# Altium PCB Tigershark-rev2-Panel.PcbDoc
Units mil, origin at the board's own origin, x right, y up, seen from the top; angles counter-clockwise.
Board outline 4612.83 x 8609.74 mil, 4 copper layers (Top Layer, Groun Plane, Power Plane, Bottom Layer), stack 64.208 mil thick; 8 components, 0 nets, 12 pads, 0 vias.
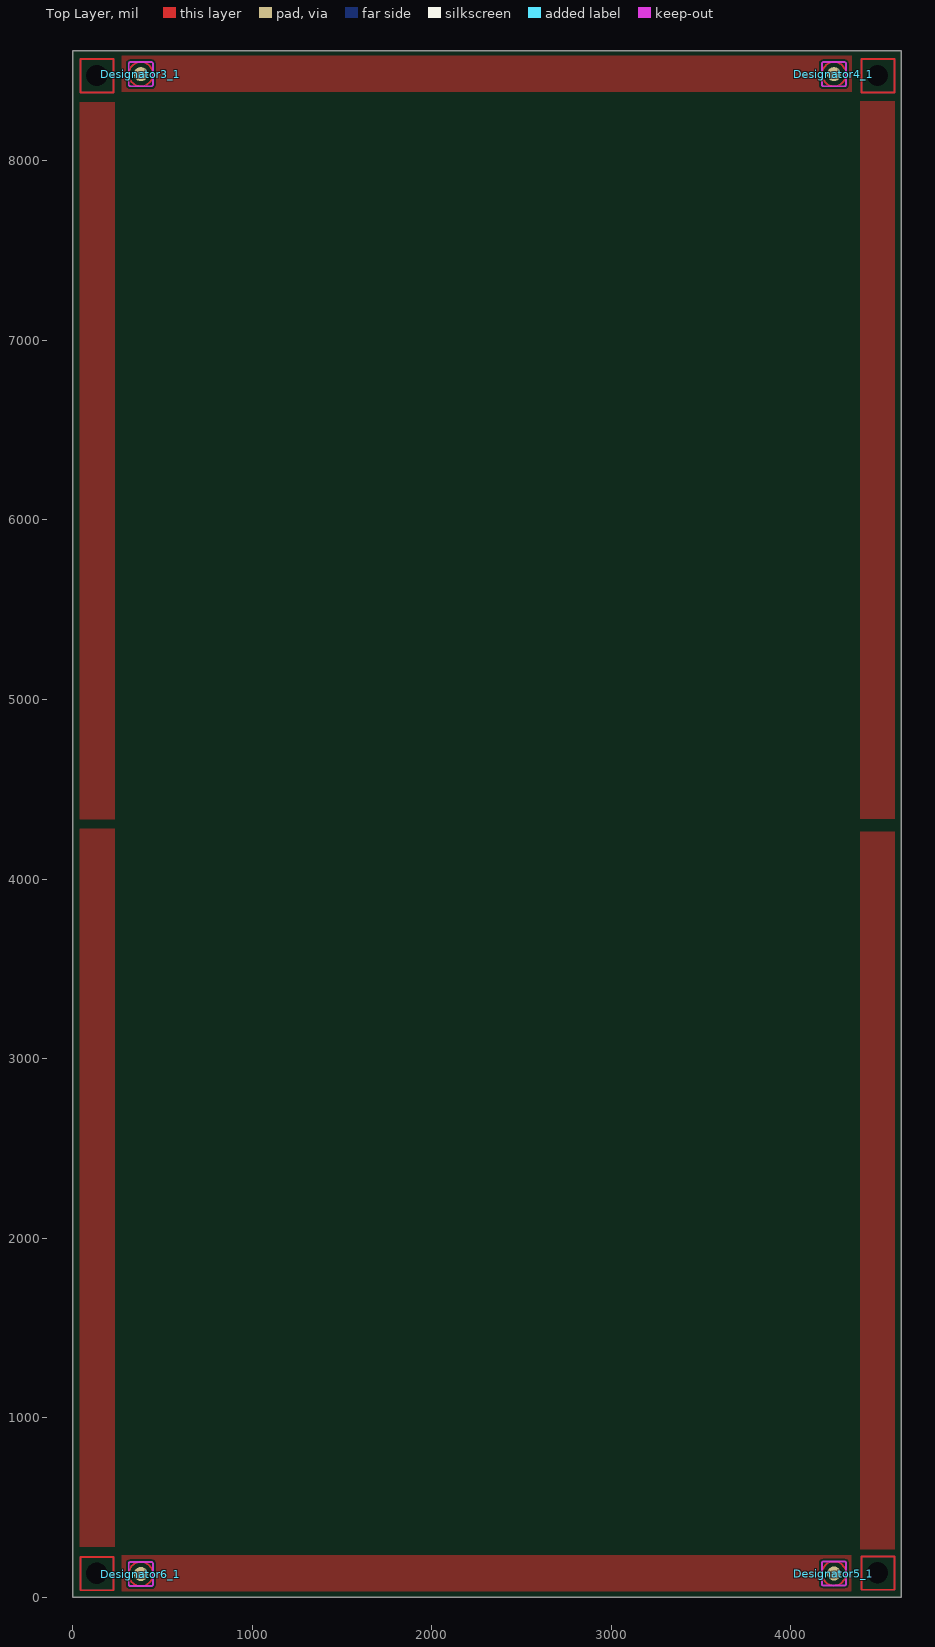
[diagram p0: Top Layer view]
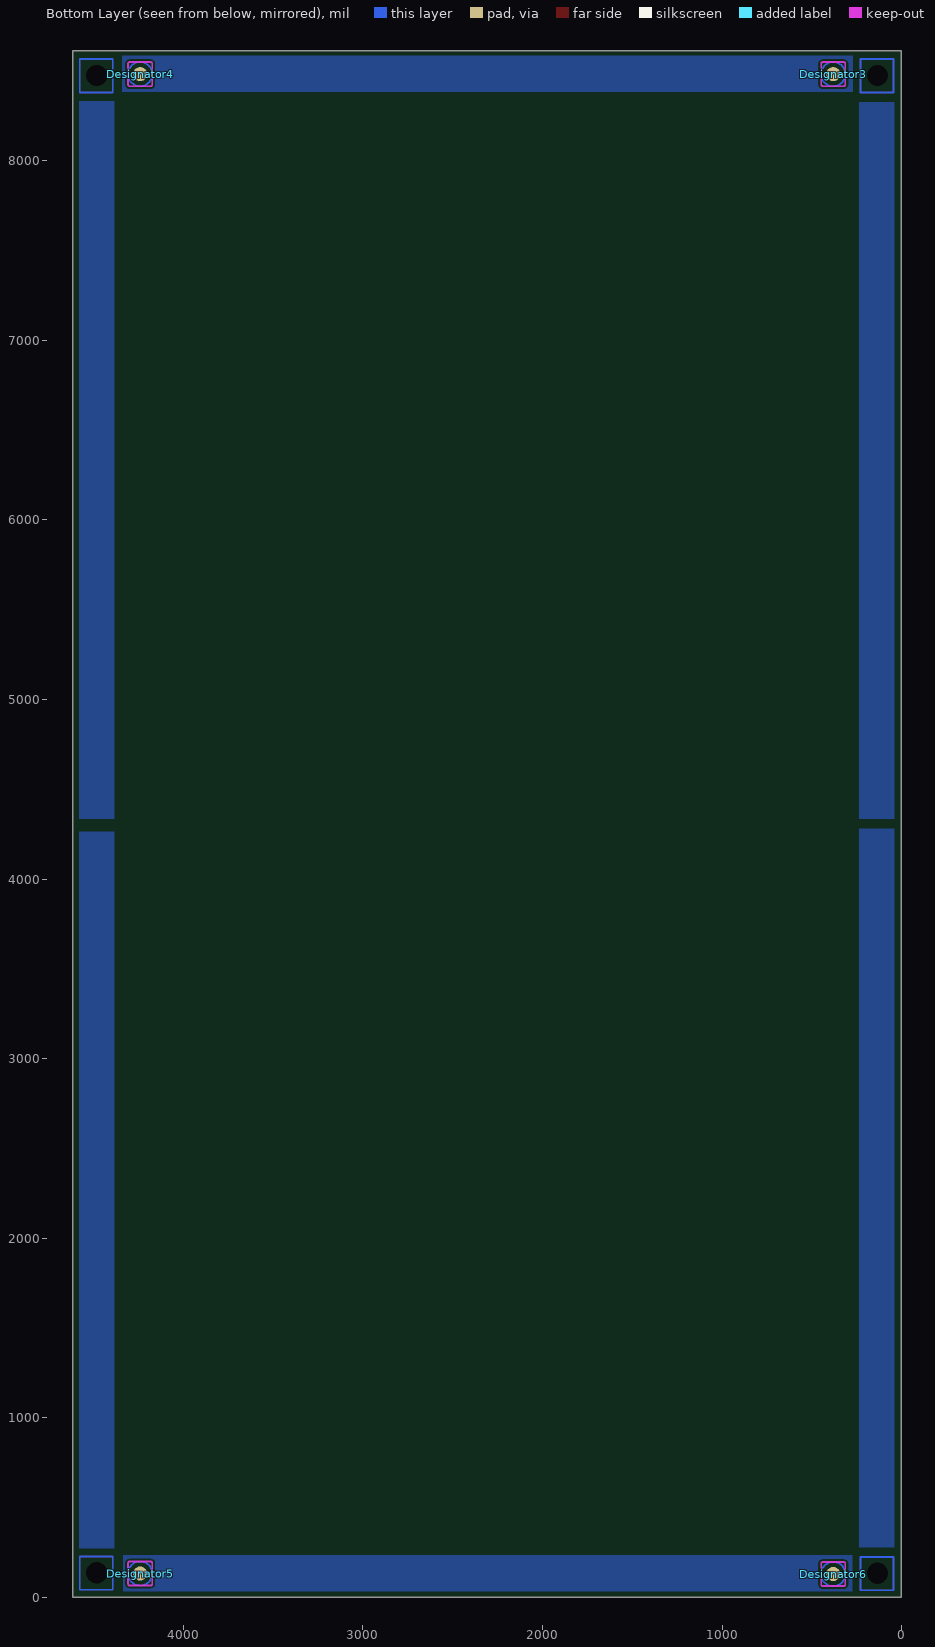
[diagram p1: Bottom Layer view, seen from below]
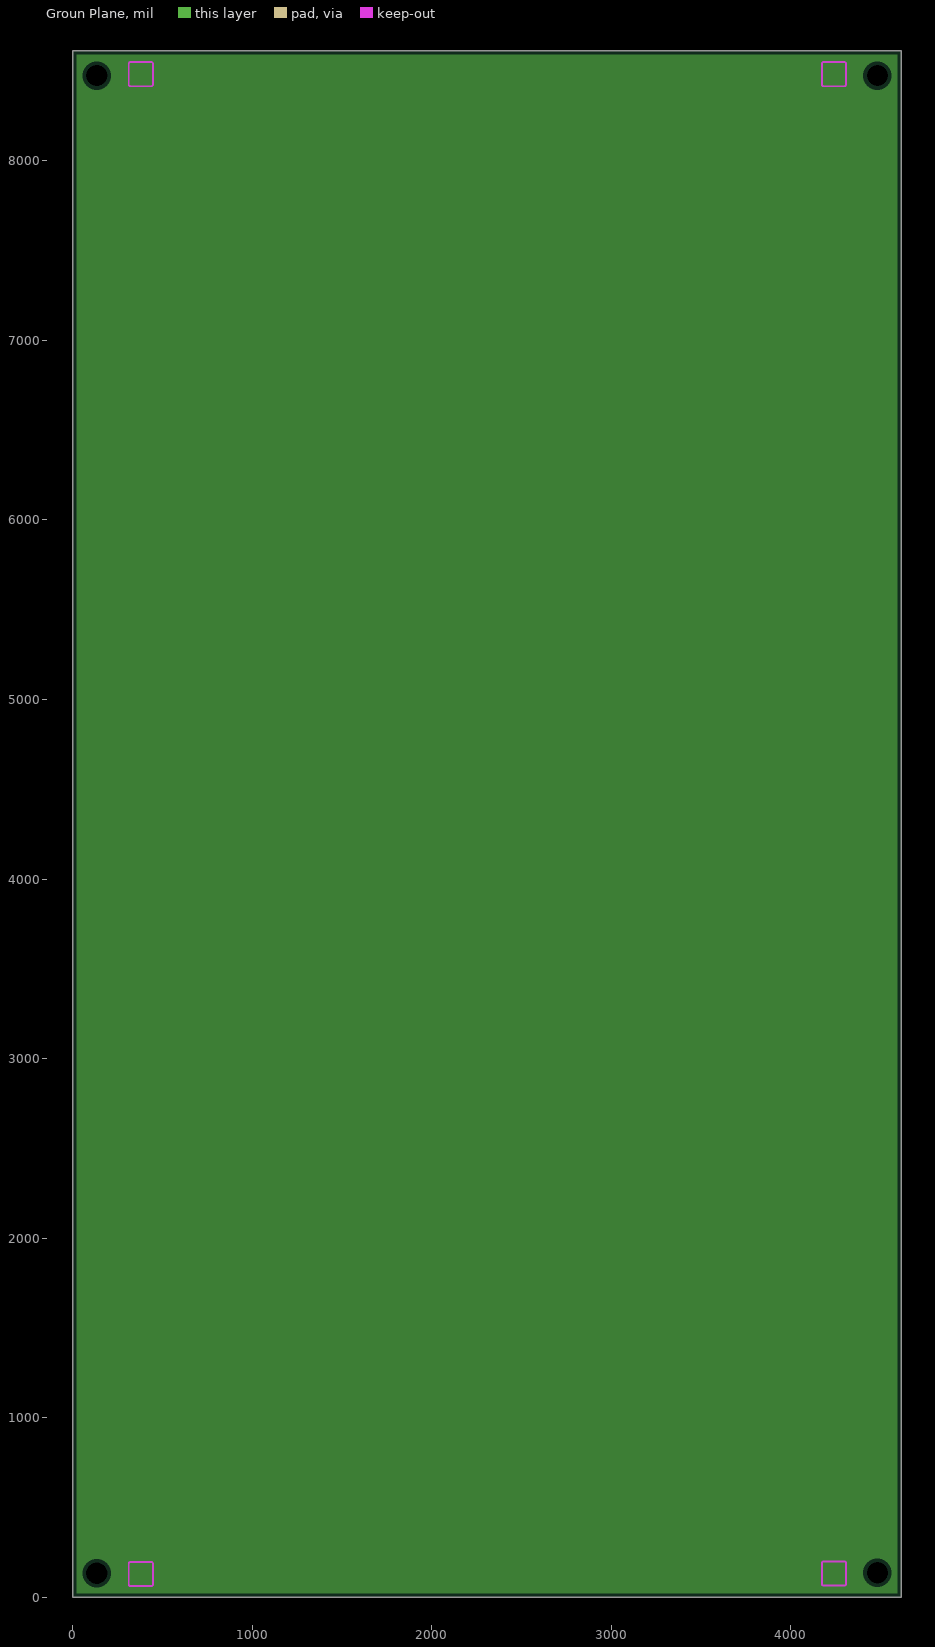
[diagram p2: Groun Plane, clearances drawn from the general rule]
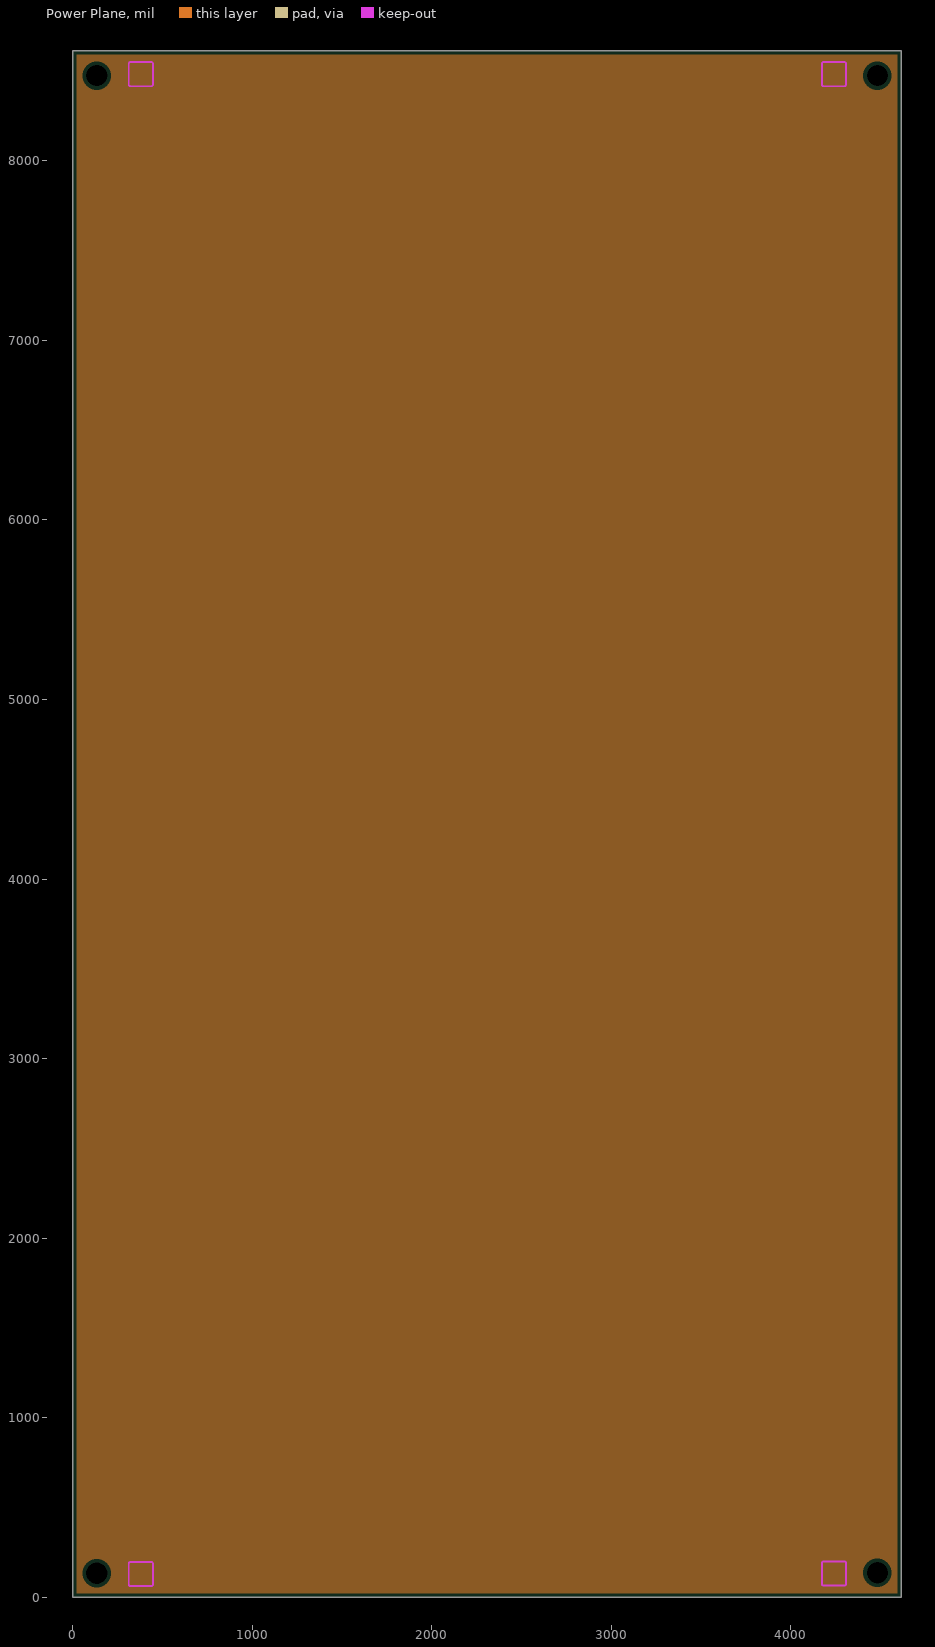
[diagram p3: Power Plane, clearances drawn from the general rule]

## Layer stack, top to bottom
Top Solder: solder mask 0.4, Solder Resist, Dk 3.5
Top Layer: signal copper 2.75
Dielectric1: core 21.654, FR-4, Dk 4.8
Groun Plane: plane copper 1.4
Dielectric2: prepreg 12.6, FR-4, Dk 4.3
Power Plane: plane copper 1.4
Dielectric3: core 21.654, FR-4, Dk 4.8
Bottom Layer: signal copper 2.75
Bottom Solder: solder mask 0.4, Solder Resist, Dk 3.5

## Board outline
2.17,2.17 2.17,8611.91 4615,8611.91 4615,2.17

## Design rules (kind name [scope] priority, off if disabled: settings)
Clearance [All] p1: gap=10
PlaneClearance [All] p1: clearance=20
PlaneConnect [All] p1: planeconnectstyle=Relief reliefexpansion=20 reliefentries=4 reliefconductorwidth=10 reliefairgap=10
PolygonConnect [All] p1: connectstyle=Relief reliefconductorwidth=10 reliefentries=4 polygonreliefangle="90 Angle" airgapwidth=10
RoutingVias [All] p1: holewidth=28 width=50 viastyle="Through Hole" minholewidth=28 minwidth=50 maxholewidth=28 maxwidth=50
SolderMaskExpansion [All] p1: expansion=4
Width [All] p1: maxlimit=10 minlimit=10 preferedwidth=10
28 further rules are at their usual default settings.

## Components (designator, comment, footprint, x,y, rotation, side; value= is the part's Value field where it differs from the comment)
Designator3 "Comment" FIDUCIAL-2X3-PANEL 381.1,8481.91 r90 bottom
Designator3_1 "Comment" FIDUCIAL-2X3-PANEL 381.1,8481.91 r90 top
Designator4 "Comment" FIDUCIAL-2X3-PANEL 4239.96,8481.91 r90 bottom
Designator4_1 "Comment" FIDUCIAL-2X3-PANEL 4239.96,8481.91 r90 top
Designator5 "Comment" FIDUCIAL-2X3-PANEL 4239.96,134.06 r90 bottom
Designator5_1 "Comment" FIDUCIAL-2X3-PANEL 4239.96,134.06 r90 top
Designator6 "Comment" FIDUCIAL-2X3-PANEL 381.1,131.1 r90 bottom
Designator6_1 "Comment" FIDUCIAL-2X3-PANEL 381.1,131.1 r90 top

## Footprints (in the part's own frame and the unit in brackets; to place one, negate y for a bottom-side part, rotate by r counter-clockwise, add the part's x,y. Pads: shape width x height; smd on the part's side, far side on the other; paste and mask are expansions set on the pad)
FIDUCIAL-2X3-PANEL [mm]
  rrect100% 2x2 smd paste+0 mask+0.508: 1(0,0)
  Top Layer circle w0.178: c0,0 r1.7
  Keep-Out Layer lines w0.254: -1.5,-1.7 cw(c-1.5,-1.5) -1.7,-1.5 -1.7,1.5 cw(c-1.5,1.5) -1.5,1.7 1.5,1.7 cw(c1.5,1.5) 1.7,1.5 1.7,-1.5 cw(c1.5,-1.5) 1.5,-1.7 -1.5,-1.7
  body extent -1.01,-1.01 1.02,1.01, height 0.02

## Free pads (board coordinates)
  round 0 hole 118.11 unplated paste-3897.64 mask-4.02: 0(135.04,135.04) 1(4482.09,137.99) 2(4482.09,8473.91) 3(135.04,8473.91)

## Nets (pads, with @x,y where several pads share a name; then routed paths per layer and width w, separated by ;. In a path a pad name is that pad's centre, name@x,y a point inside that pad or via, vN(x,y) a via of type N, cw(c..) or ccw(c..) an arc to the next point about the centre after c; other vN are vias at no path point)
pads on no net: Designator3.1 Designator3_1.1 Designator4.1 Designator4_1.1 Designator5.1 Designator5_1.1 Designator6.1 Designator6_1.1
copper on no net: | length 5921.3
  Top Layer w10: 45.47,40.55 229.53,40.55 229.53,226.57 45.47,226.57 45.47,40.55 ; 45.47,8379.43 45.47,8565.45 229.53,8565.45 229.53,8379.43 45.47,8379.43 ; 4392.52,43.5 4576.58,43.5 4576.58,229.53 4392.52,229.53 4392.52,43.5 ; 4392.52,8379.43 4392.52,8565.45 4576.58,8565.45 4576.58,8379.43 4392.52,8379.43
  Bottom Layer w10: 45.47,40.55 229.53,40.55 229.53,226.57 45.47,226.57 45.47,40.55 ; 45.47,8379.43 229.53,8379.43 229.53,8565.45 45.47,8565.45 45.47,8379.43 ; 4392.52,43.5 4392.52,229.53 4576.58,229.53 4576.58,43.5 4392.52,43.5 ; 4392.52,8379.43 4576.58,8379.43 4576.58,8565.45 4392.52,8565.45 4392.52,8379.43

## Polygon pours and split planes (outlines as drawn)
no net on Top Layer "Frame-Copper" (solid, pour order 44): 4578.9,8330 4578.9,4335 4627.13,4335 4385,4335 4385,8330
no net on Top Layer "Frame-Copper" (solid, pour order 45): 4578.9,4265 4578.9,270 4627.13,270 4385,270 4385,4265
no net on Top Layer "Frame-Copper" (solid, pour order 47): 235,4280 235,281.72 283.23,281.72 41.1,281.72 41.1,4280
no net on Top Layer "Frame-Copper" (solid, pour order 39): 273.53,8384.61 4340,8384.61 4340,8584.41 273.53,8584.41
no net on Top Layer "Frame-Copper" (solid, pour order 41): 275.79,35.63 4335,35.63 4335,235.43 275.79,235.43
no net on Top Layer "Frame-Copper" (solid, pour order 49): 234.95,8325 234.95,4334 283.18,4334 41.05,4334 41.05,8325
no net on Bottom Layer "Frame-Copper" (solid, pour order 42): 4578.9,4265 4578.9,274 4627.13,274 4385,274 4385,4265
no net on Bottom Layer "Frame-Copper" (solid, pour order 43): 4578.9,8330 4578.9,4335 4627.13,4335 4385,4335 4385,8330
no net on Bottom Layer "Frame-Copper" (solid, pour order 38): 273.37,8383.66 4340,8383.66 4340,8583.46 273.37,8583.46
no net on Bottom Layer "Frame-Copper" (solid, pour order 48): 235,8325 235,4335 283.23,4335 41.1,4335 41.1,8325
no net on Bottom Layer "Frame-Copper" (solid, pour order 46): 235,4280 235,279.72 283.23,279.72 41.1,279.72 41.1,4280
no net on Bottom Layer "Frame-Copper" (solid, pour order 40): 275.79,35.63 4335,35.63 4335,235.43 275.79,235.43
no net on Groun Plane (split plane): 4594.9,22.26 22.26,22.26 22.26,8591.81 4594.9,8591.81
no net on Power Plane (split plane): 4594.9,22.26 22.26,22.26 22.26,8591.81 4594.9,8591.81

## Silkscreen, mask and mechanical layers (free items; w line width, h text height)
Mechanical 2:
  drawing of 347 lines, arcs and shapes, not listed
  text "Notes" at 11634.8,8071.26 h60
  text "Layer" at 7100.93,8063.03 h60
  text "Name" at 7510.84,8063.03 h60
  text "Material" at 8440.59,8063.03 h60
  text "Thickness" at 9300.35,8063.03 h60
  text "Constant" at 9950.19,8063.03 h60
  text "Board Layer Stack" at 10520.05,8063.03 h60
  text "File" at 6794.8,8051.26 h60
  text "1" at 7100.93,7943.03 h60
  text "Top Paste" at 7510.84,7943.03 h60
  text "GTP" at 6814.8,7931.26 h60
  text "2" at 7100.93,7823.03 h60
  text "Top Overlay" at 7510.84,7823.03 h60
  text "GTO" at 6814.8,7811.26 h60
  text "3" at 7100.93,7703.03 h60
  text "Top Solder" at 7510.84,7703.03 h60
  text "Solder Resist" at 8440.59,7703.03 h60
  text "0.010mm" at 9300.35,7703.03 h60
  text "3.5" at 9950.19,7703.03 h60
  text "GTS" at 6814.8,7691.26 h60
  text "4" at 7100.93,7583.03 h60
  text "Top Layer" at 7510.84,7583.03 h60
  text "Copper" at 8440.59,7583.03 h60
  text "0.070mm" at 9300.35,7583.03 h60
  text "GTL" at 6814.8,7571.26 h60
  text "5" at 7100.93,7463.03 h60
  text "Dielectric1" at 7510.84,7463.03 h60
  text "FR-4" at 8440.59,7463.03 h60
  text "0.550mm" at 9300.35,7463.03 h60
  text "4.8" at 9950.19,7463.03 h60
  text "Negative Layer" at 11614.8,7351.26 h60
  text "6" at 7100.93,7343.03 h60
  text "Groun Plane" at 7510.84,7343.03 h60
  text "Copper" at 8440.59,7343.03 h60
  text "0.036mm" at 9300.35,7343.03 h60
  text "GP1" at 6814.8,7331.26 h60
  text "7" at 7100.93,7223.03 h60
  text "Dielectric2" at 7510.84,7223.03 h60
  text "FR-4" at 8440.59,7223.03 h60
  text "0.320mm" at 9300.35,7223.03 h60
  text "4.3" at 9950.19,7223.03 h60
  text "8" at 7100.93,7103.03 h60
  text "Power Plane" at 7510.84,7103.03 h60
  text "Copper" at 8440.59,7103.03 h60
  text "0.036mm" at 9300.35,7103.03 h60
  text "G1" at 6814.8,7091.26 h60
  text "9" at 7100.93,6983.03 h60
  text "Dielectric3" at 7510.84,6983.03 h60
  text "FR-4" at 8440.59,6983.03 h60
  text "0.550mm" at 9300.35,6983.03 h60
  text "4.8" at 9950.19,6983.03 h60
  text "GBL" at 6814.8,6871.26 h60
  text "10" at 7100.93,6863.03 h60
  text "Bottom Layer" at 7510.84,6863.03 h60
  text "Copper" at 8440.59,6863.03 h60
  text "0.070mm" at 9300.35,6863.03 h60
  text "11" at 7100.93,6743.03 h60
  text "Bottom Solder" at 7510.84,6743.03 h60
  text "Solder Resist" at 8440.59,6743.03 h60
  text "0.010mm" at 9300.35,6743.03 h60
  text "3.5" at 9950.19,6743.03 h60
  text "GBS" at 6814.8,6731.26 h60
  text "12" at 7100.93,6623.03 h60
  text "Bottom Overlay" at 7510.84,6623.03 h60
  text "13" at 7100.93,6503.03 h60
  text "Bottom Paste" at 7510.84,6503.03 h60
Drill Drawing:
  circle w10: c7090.6,5240.44 r20
  circle w10: c7090.6,5240.44 r33.33
  lines w10: 7057.26,4157.11 7123.93,4157.11 7123.93,4223.77 7057.26,4223.77 7057.26,4157.11 ; 7057.26,4307.11 7057.26,4323.77 7073.93,4340.44 7057.26,4357.11 7057.26,4373.77 7073.93,4373.77 7090.6,4357.11 7107.26,4373.77 7123.93,4373.77 7123.93,4357.11 7107.26,4340.44 7123.93,4323.77 7123.93,4307.11 7107.26,4307.11 7090.6,4323.77 7073.93,4307.11 7057.26,4307.11 ; 7057.26,4473.77 7073.93,4473.77 7073.93,4457.11 7107.26,4457.11 7107.26,4473.77 7123.93,4473.77 7123.93,4507.11 7107.26,4507.11 7107.26,4523.77 7073.93,4523.77 7073.93,4507.11 7057.26,4507.11 7057.26,4473.77 ; 7057.26,4640.44 7090.6,4607.11 7123.93,4640.44 7090.6,4673.77 7057.26,4640.44 ; 7057.26,4757.11 7090.6,4773.77 7123.93,4757.11 7107.26,4790.44 7123.93,4823.77 7090.6,4807.11 7057.26,4823.77 7073.93,4790.44 7057.26,4757.11 ; 7057.26,4973.77 7123.93,4973.77 7090.6,4907.11 7057.26,4973.77 ; 7057.26,5073.77 7073.93,5073.77 7073.93,5057.11 7107.26,5057.11 7107.26,5073.77 7123.93,5073.77 7123.93,5107.11 7107.26,5107.11 7107.26,5123.77 7073.93,5123.77 7073.93,5107.11 7057.26,5107.11 7057.26,5073.77 ; 7057.26,5357.11 7123.93,5357.11 7123.93,5423.77 7057.26,5423.77 7057.26,5357.11 ; 7070.6,4480.44 7080.6,4480.44 7080.6,4470.44 7100.6,4470.44 7100.6,4480.44 7110.6,4480.44 7110.6,4500.44 7100.6,4500.44 7100.6,4510.44 7080.6,4510.44 7080.6,4500.44 7070.6,4500.44 7070.6,4480.44 ; 7070.6,4960.44 7110.6,4960.44 7090.6,4920.44 7070.6,4960.44 ; 7070.6,5370.44 7110.6,5370.44 7110.6,5410.44 7070.6,5410.44 7070.6,5370.44
  lines w15: 6997.47,4112.11 10876.44,4112.11 ; 6997.47,5462.11 10876.44,5462.11 ; 7548.35,3962.11 7548.35,5612.11 ; 8246.16,3962.11 8246.16,5612.11 ; 9591.77,3962.11 9591.77,5612.11 ; 10097.64,3962.11 10097.64,5612.11 ; 6997.47,3962.11 10876.44,3962.11 10876.44,5612.11 6997.47,5612.11 6997.47,3962.11
  text "Symbol" at 7087.47,5507.11 h72
  text "Hit Count" at 7593.35,5507.11 h72
  text "Finished Hole Size" at 8291.16,5507.11 h72
  text "Plated" at 9636.77,5507.11 h72
  text "Hole Type" at 10142.64,5507.11 h72
  text "4" at 7593.35,5357.11 h60
  text "1.499mm (59.00mil)" at 8291.16,5357.11 h60
  text "PTH" at 9636.77,5357.11 h60
  text "Round" at 10142.64,5357.11 h60
  text "4" at 7593.35,5207.11 h60
  text "2.210mm (87.00mil)" at 8291.16,5207.11 h60
  text "PTH" at 9636.77,5207.11 h60
  text "Round" at 10142.64,5207.11 h60
  text "8" at 7593.35,5057.11 h60
  text "0.965mm (38.00mil)" at 8291.16,5057.11 h60
  text "PTH" at 9636.77,5057.11 h60
  text "Round" at 10142.64,5057.11 h60
  text "12" at 7593.35,4907.11 h60
  text "3.000mm (118.11mil)" at 8291.16,4907.11 h60
  text "NPTH" at 9636.77,4907.11 h60
  text "Round" at 10142.64,4907.11 h60
  text "24" at 7593.35,4757.11 h60
  text "1.600mm (63.00mil)" at 8291.16,4757.11 h60
  text "PTH" at 9636.77,4757.11 h60
  text "Round" at 10142.64,4757.11 h60
  text "32" at 7593.35,4607.11 h60
  text "1.397mm (55.00mil)" at 8291.16,4607.11 h60
  text "PTH" at 9636.77,4607.11 h60
  text "Round" at 10142.64,4607.11 h60
  text "84" at 7593.35,4457.11 h60
  text "0.900mm (35.43mil)" at 8291.16,4457.11 h60
  text "PTH" at 9636.77,4457.11 h60
  text "Round" at 10142.64,4457.11 h60
  text "120" at 7593.35,4307.11 h60
  text "1.016mm (40.00mil)" at 8291.16,4307.11 h60
  text "PTH" at 9636.77,4307.11 h60
  text "Round" at 10142.64,4307.11 h60
  text "2502" at 7593.35,4157.11 h60
  text "0.381mm (15.00mil)" at 8291.16,4157.11 h60
  text "PTH" at 9636.77,4157.11 h60
  text "Round" at 10142.64,4157.11 h60
  text "2790 Total" at 7593.35,4007.11 h60
Mechanical 30:
  lines w10: 2,2 2,6124.05 ; 2.17,2.17 2.17,8611.91 4615,8611.91 4615,2.17 2.17,2.17
Mechanical 31:
  lines w10: -2,4310.1 4616,4310.1 ; 2.17,252.17 4611.02,252.17 ; 9.12,8361.91 4615.02,8361.91 ; 252.17,6.1 252.17,8615 ; 4361.02,-1.85 4361.02,8610 ; 4611.02,-6.85 4615,8610

## Panel: embedded boards
"Tigershark 3D R2.4 - TR.PcbDoc" at 256.1,256.1, 2 rows x 1 columns, spacing 4050 x 4100, rotation 0